# EAGLE board ghettoduino-holes (EAGLE 5.06)
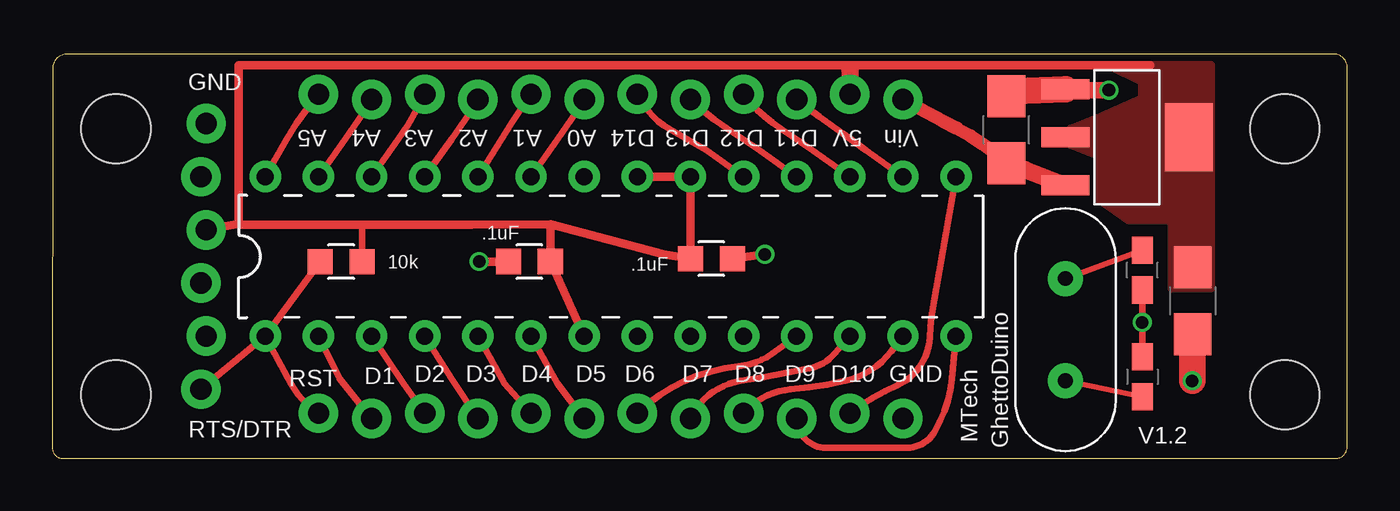
[diagram p0: board, top side]
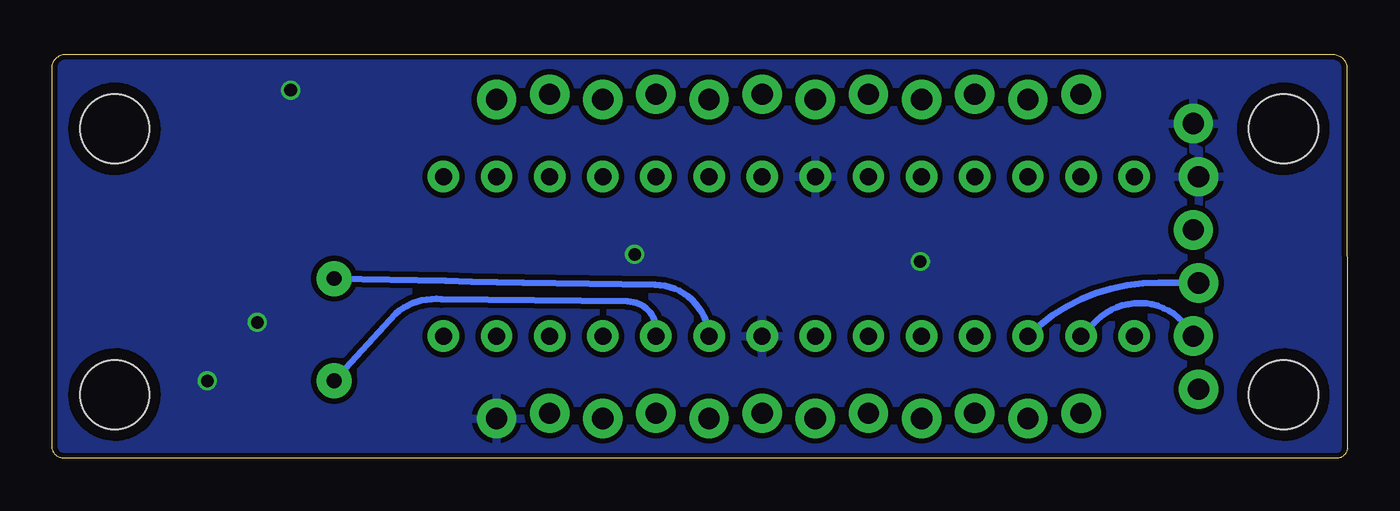
[diagram p1: board, bottom side, seen from below]

Size 61.9 x 19.32 mm. Coordinates in mm from the lower left corner, seen from the top.
Outline: 0.78,19.31 arc87 0.02,18.77 0,0.53 arc93 0.51,0 61.3,0 arc90 61.9,0.51 61.9,18.8 arc90 61.1,19.31 0.78,19.31
Copper layers (1*16): Top 0.035mm / dielectric 1.5mm / Bottom 0.035mm
Design rules "Fusion_eagle_rule_v1.1": minimum track width 6mil, minimum drill 12mil, track to track 6mil, track to pad 6mil, pad to pad 6mil, via to via 6mil, smd to smd 0mil, copper to edge 10mil, drill to drill 10mil, minimum pad ring 10mil, minimum via ring 6mil, stop-mask expansion 2mil, vias tented up to drill 100mil, thermal gap 10mil

## Footprints (pad centres in the part's own frame; a part is rotated, then mirrored left to right if it is on the bottom)
ZLDO1117 = smd 0.95 x 2.3: 1 -2.3,-3; 2 0,-3; 3 2.3,-3 | smd 3.25 x 2.3: 4 0,2.9
0603-CAP = smd 1.3 x 1: 1 -0.95,0; 2 0.95,0
0805 = smd 1.2 x 1.2: 1 -1,0; 2 1,0
1206 = smd 2 x 1.8: 1 -1.6,0; 2 1.6,0
DIL28-3 = drill 0.813 pad 1.5 round: 1 -16.51,-3.81; 2 -13.97,-3.81; 3 -11.43,-3.81; 4 -8.89,-3.81; 5 -6.35,-3.81; 6 -3.81,-3.81; 7 -1.27,-3.81; 8 1.27,-3.81; 9 3.81,-3.81; 10 6.35,-3.81; 11 8.89,-3.81; 12 11.43,-3.81; 13 13.97,-3.81; 14 16.51,-3.81; 15 16.51,3.81; 16 13.97,3.81; 17 11.43,3.81; 18 8.89,3.81; 19 6.35,3.81; 20 3.81,3.81; 21 1.27,3.81; 22 -1.27,3.81; 23 -3.81,3.81; 24 -6.35,3.81; 25 -8.89,3.81; 26 -11.43,3.81; 27 -13.97,3.81; 28 -16.51,3.81
1X06_LOCK = drill 1.016 pad 1.88 round: 1 0,0.127; 2 2.54,-0.127; 3 5.08,0.127; 4 7.62,-0.127; 5 10.16,0.127; 6 12.7,-0.127
HC49US = drill 0.7 pad 1.676 round: 1 -2.44,0; 2 2.44,0
1X12_LOCK = drill 1.016 pad 1.88 round: 1 0,0.127; 2 2.54,-0.127; 3 5.08,0.127; 4 7.62,-0.127; 5 10.16,0.127; 6 12.7,-0.127; 7 15.24,0.127; 8 17.78,-0.127; 9 20.32,0.127; 10 22.86,-0.127; 11 25.4,0.127; 12 27.94,-0.127
STAND-OFF = hole 3.302: 0,0

## Placement (x,y rotation side)
5V  ZLDO1117  [ZLDO1117]  51.43,15.35 270 top
C1  18pF  [0603-CAP]  52.11,9 90 top
C2  .1uF  [0805]  31.51,9.55 180 top
C3  18pF  [0603-CAP]  52.11,3.9 270 top
C4  .1uF  [0805]  22.81,9.41 180 top
C5  10uF  [1206]  54.51,7.53 270 top
C8  10uF  [1206]  45.61,15.71 90 top
IC1  [DIL28-3]  26.7,9.65 0 top
JP1  [1X06_LOCK]  7.23,3.3 90 top
R1  10k  [0805]  13.81,9.4 180 top
U$1  HC49US  [HC49US]  48.43,6.15 270 top
U$2  M12  [1X12_LOCK]  12.73,2.03 0 top
U$5  M12  [1X12_LOCK]  12.73,17.27 0 top
U$8  [STAND-OFF]  3.05,15.75 0 top
U$9  [STAND-OFF]  3.05,3.05 0 top
U$10  [STAND-OFF]  58.93,15.75 0 top
U$11  [STAND-OFF]  58.93,3.05 0 top

## Library data of the parts
5V C1-C5 C8 IC1 JP1 R1 U$1 U$2 U$5 U$8-U$11 = 1dah

## Nets
5V: 5V.2 5V.4 C2.2 C4.1 C5.1 IC1.7 IC1.20 IC1.21 JP1.4 R1.1 U$5.11
A0: IC1.23 U$5.6
A1: IC1.24 U$5.5
A2: IC1.25 U$5.4
A3: IC1.26 U$5.3
A4: IC1.27 U$5.2
A5: IC1.28 U$5.1
D0: IC1.2 JP1.2 U$2.2
D1: IC1.3 JP1.3 U$2.3
D2: IC1.4 U$2.4
D3: IC1.5 U$2.5
D4: IC1.6 U$2.6
D5: IC1.11 U$2.7
D6: IC1.12 U$2.8
D7: IC1.13 U$2.9
D8: IC1.14 U$2.10
D9: IC1.15 U$2.11
D10: IC1.16 U$5.10
D11: IC1.17 U$5.9
D12: IC1.18 U$5.8
D13: IC1.19 U$5.7
GND: 5V.1 C1.1 C2.1 C3.1 C4.2 C5.2 C8.2 IC1.8 IC1.22 JP1.5 JP1.6 U$2.12
N$1: C3.2 IC1.10 U$1.2
N$3: C1.2 IC1.9 U$1.1
RESET: IC1.1 JP1.1 R1.2 U$2.1
VIN: 5V.3 C8.1 U$5.12

## Tracks (layer width: path | path; a pad name or v marks a point on that pad's centre or on a via)
5V
  Top 0.305: 14.81,11.18 R1.1
  Top 0.406: 8.92,11.18 14.81,11.18 20.04,11.18 23.81,11.2 | 8.92,11.18 8.92,18.8 38.38,18.8 | 38.38,18.8 52.5,18.8 | 23.81,11.2 C4.1 IC1.7 | IC1.21 IC1.20 C2.2 29.21,9.75 23.81,11.2 | JP1.4 8.8,11.2 8.92,11.18 | 38.38,18.8 arc53 38.13,18.6
  Top 0.813: 38.13,18.6 U$5.11
  pour Top (no thermals): 49.96,16.26 48.69,15.75 48.69,14.99 49.96,14.48 49.96,12.45 51.48,11.38 53.51,11.38 53.51,8.13 55.39,8.13 55.39,18.8 50.46,18.8 52.11,18 52.11,17.2
A0
  Top 0.305: IC1.23 24.16,15.24 arc4 U$5.6
A1
  Top 0.305: IC1.24 21.62,15.5 arc-3 U$5.5
A2
  Top 0.305: IC1.25 19.08,15.24 arc4 U$5.4
A3
  Top 0.305: IC1.26 16.54,15.24 arc10 U$5.3
A4
  Top 0.305: IC1.27 14,15.24 arc4 U$5.2
A5
  Top 0.305: IC1.28 11.2,15.24 arc-11 U$5.1
D0
  Top 0.305: IC1.2 13.74,3.81 U$2.2
  Bottom 0.305: IC1.2 11.97,6.61 arc107 JP1.2
D1
  Top 0.305: IC1.3 16.79,3.56 U$2.3
  Bottom 0.305: JP1.3 9,8.4 arc-45 IC1.3
D2
  Top 0.305: IC1.4 19.08,3.81 U$2.4
D3
  Top 0.305: IC1.5 21.62,3.56 U$2.5
D4
  Top 0.305: IC1.6 24.16,3.56 U$2.6
D5
  Top 0.305: IC1.11 34.4,5 arc-30 32.8,4.4 arc38 U$2.7
D6
  Top 0.305: IC1.12 37.4,5 arc-38 36.2,4.3 arc-2 32.9,3.7 arc55 U$2.8
D7
  Top 0.305: IC1.13 40.1,5.1 arc-40 37.9,3.7 arc-7 35.3,3.3 arc44 U$2.9
D8
  Top 0.305: IC1.14 43,3.8 arc-24 42.2,1.3 arc-65 40.7,0.5 37,0.5 arc-90 U$2.10
D9
  Top 0.305: IC1.15 42.1,7.2 arc8 41.95,5.8 arc-64 40.4,3.5 arc13 U$2.11
D10
  Top 0.305: IC1.16 38.89,14.73 arc-1 U$5.10
D11
  Top 0.305: IC1.17 36.35,14.73 34.83,15.75 arc-18 U$5.9
D12
  Top 0.305: IC1.18 33.81,14.73 32.29,15.75 arc-9 U$5.8
D13
  Top 0.305: IC1.19 31.27,14.73 29.49,15.75 arc-35 U$5.7
GND  (via drill 0.6)
  Top 0.305: C1.1 v52.11,6.5 C3.1
  Top 0.406: C4.2 v20.41,9.41 | C2.1 v34.06,9.75
  Top 0.813: 5V.1 v50.51,17.6
  Top 1.27: 5V.1 46,17.55 C8.2 | C5.2 54.5,5.17 v54.5,3.71
  pour Bottom (isolate 0.254): -5.08,-7.62 62.23,-7.62 62.23,-5.08 62.23,34.29 -5.08,34.29
N$1
  Top 0.254: U$1.2 C3.2
  Bottom 0.305: U$1.2 45.5,6.9 arc49 43.3,7.6 34.4,7.5 arc100 IC1.10
N$3
  Top 0.254: U$1.1 C1.2
  Bottom 0.305: U$1.1 43.1,8.5 arc-4 39.4,8.4 33.1,8.3 arc85 IC1.9
RESET
  Top 0.305: IC1.1 R1.2 | JP1.1 IC1.1 | IC1.1 11.4,3.6 arc29 U$2.1
VIN
  Top 0.61: U$5.12 42.6,16.1 arc-19 C8.1
  Top 0.813: C8.1 46.51,13.8 5V.3

## Text on the board
tPlace: GND | A5 | A4 | A3 | A2 | A1 | A0 | D14 | D13 | D12 | D11 | 5V | Vin | RST | D1 | D2 | D3 | D4 | D5 | D6 | D7 | D8 | D9 | D10 | GND | V1.2 | RTS/DTR | MTech | GhettoDuino